# Altium PCB PCB.PcbDoc (part 1 of 2)
Units mil, origin at the board's own origin, x right, y up, seen from the top; angles counter-clockwise.
Board outline 2362.2 x 3307.09 mil, 4 copper layers (Top Layer, Gnd, Power, Bottom Layer), stack 23.756 mil thick; 68 components, 50 nets, 353 pads, 514 vias.
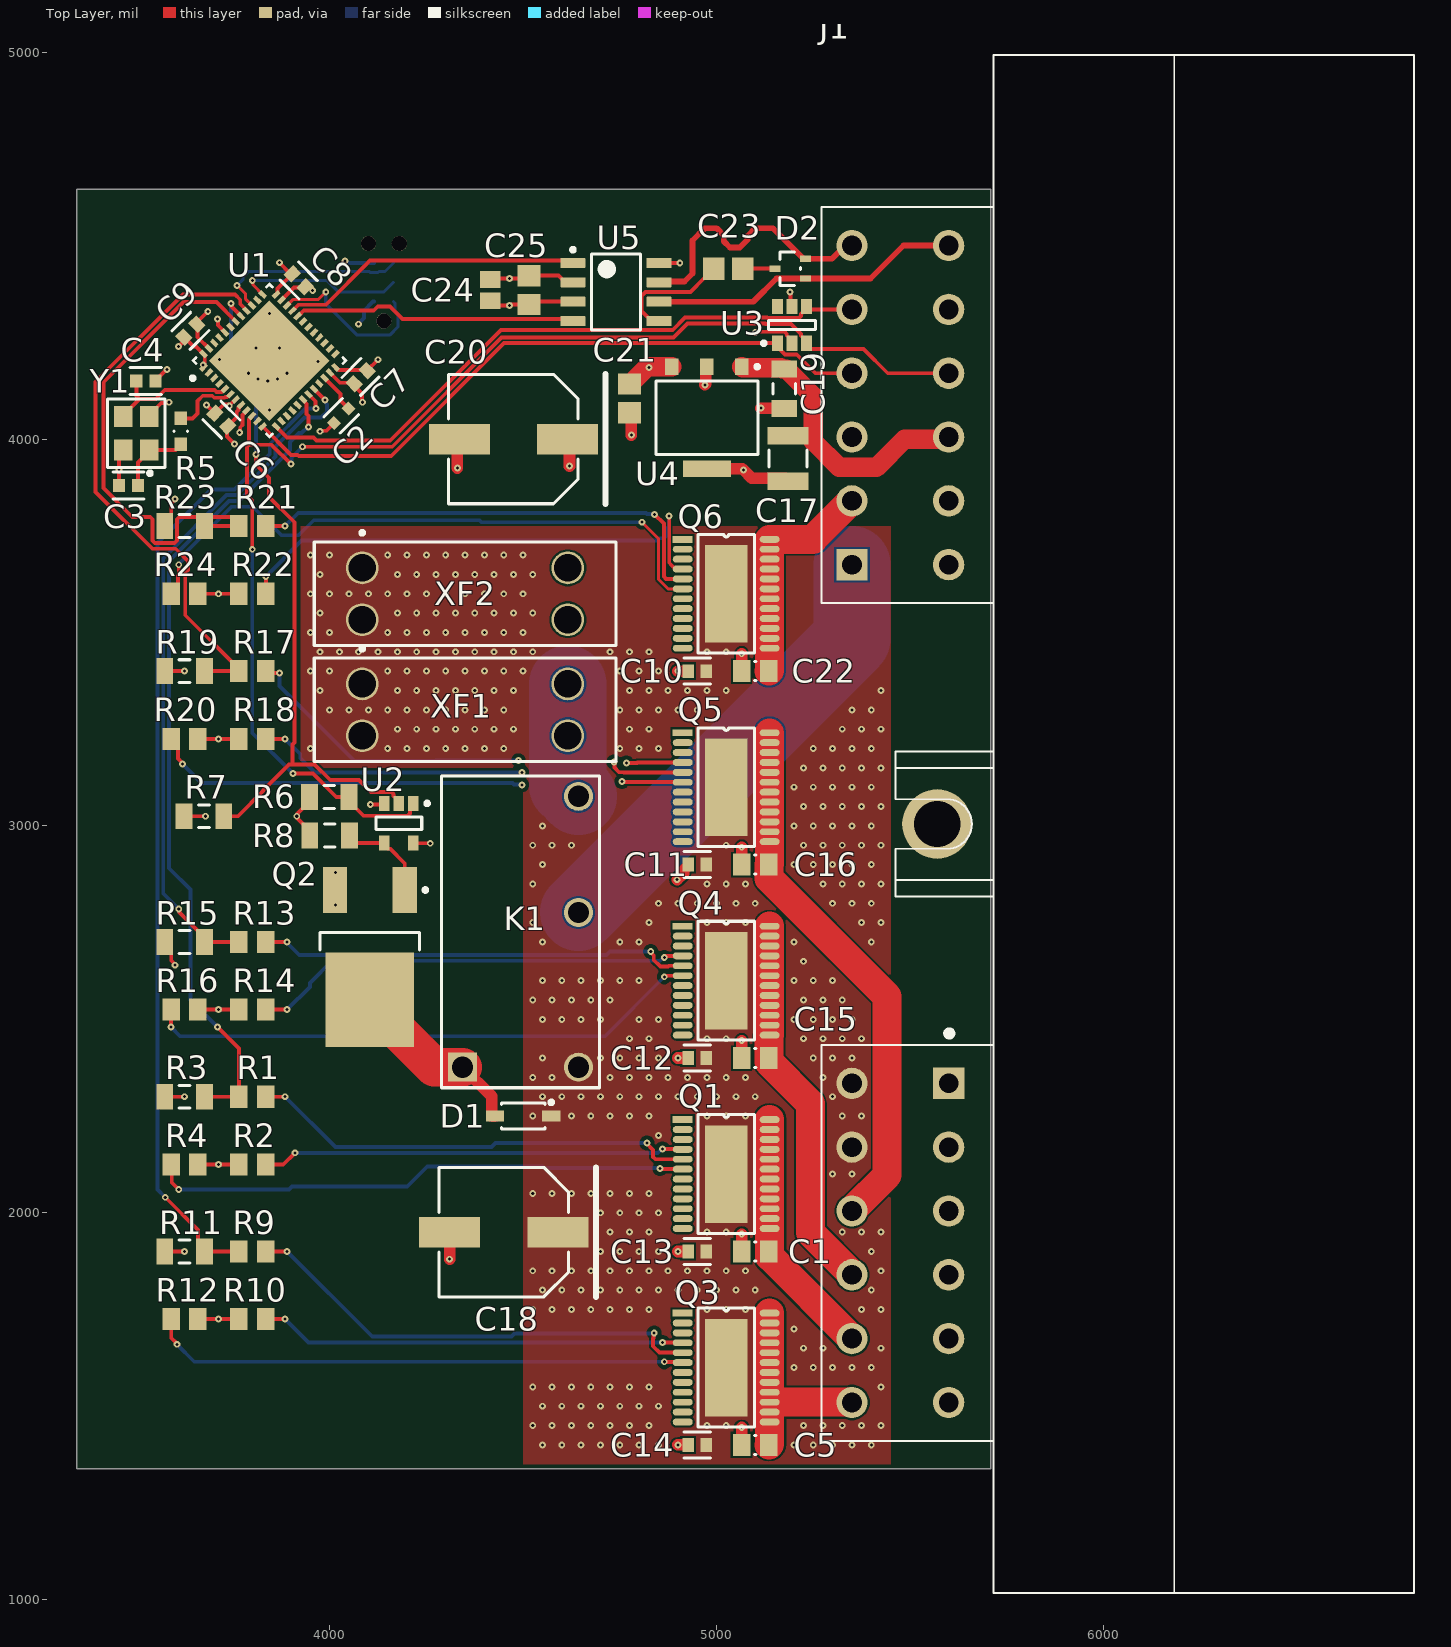
[diagram p0: Top Layer view]
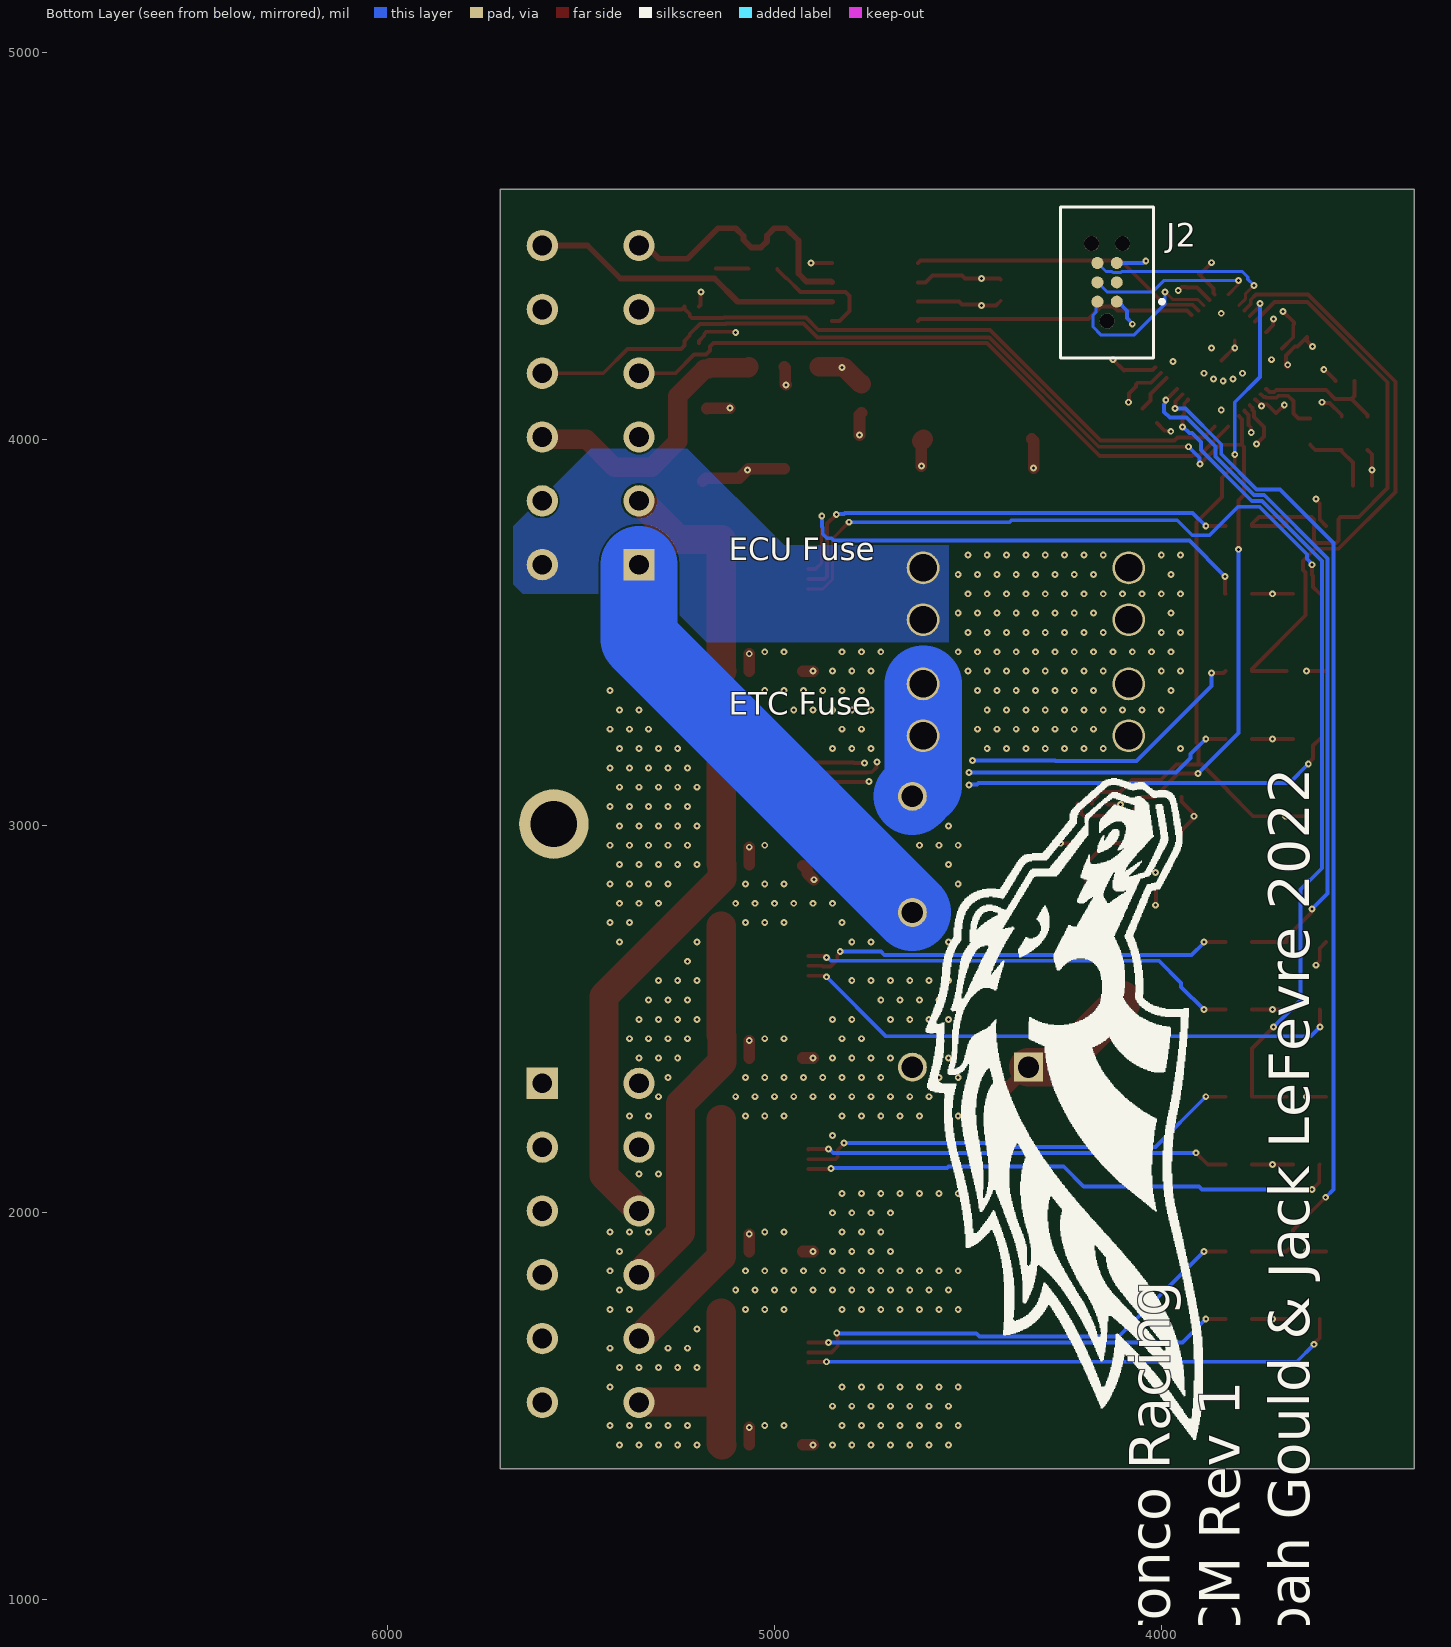
[diagram p1: Bottom Layer view, seen from below]
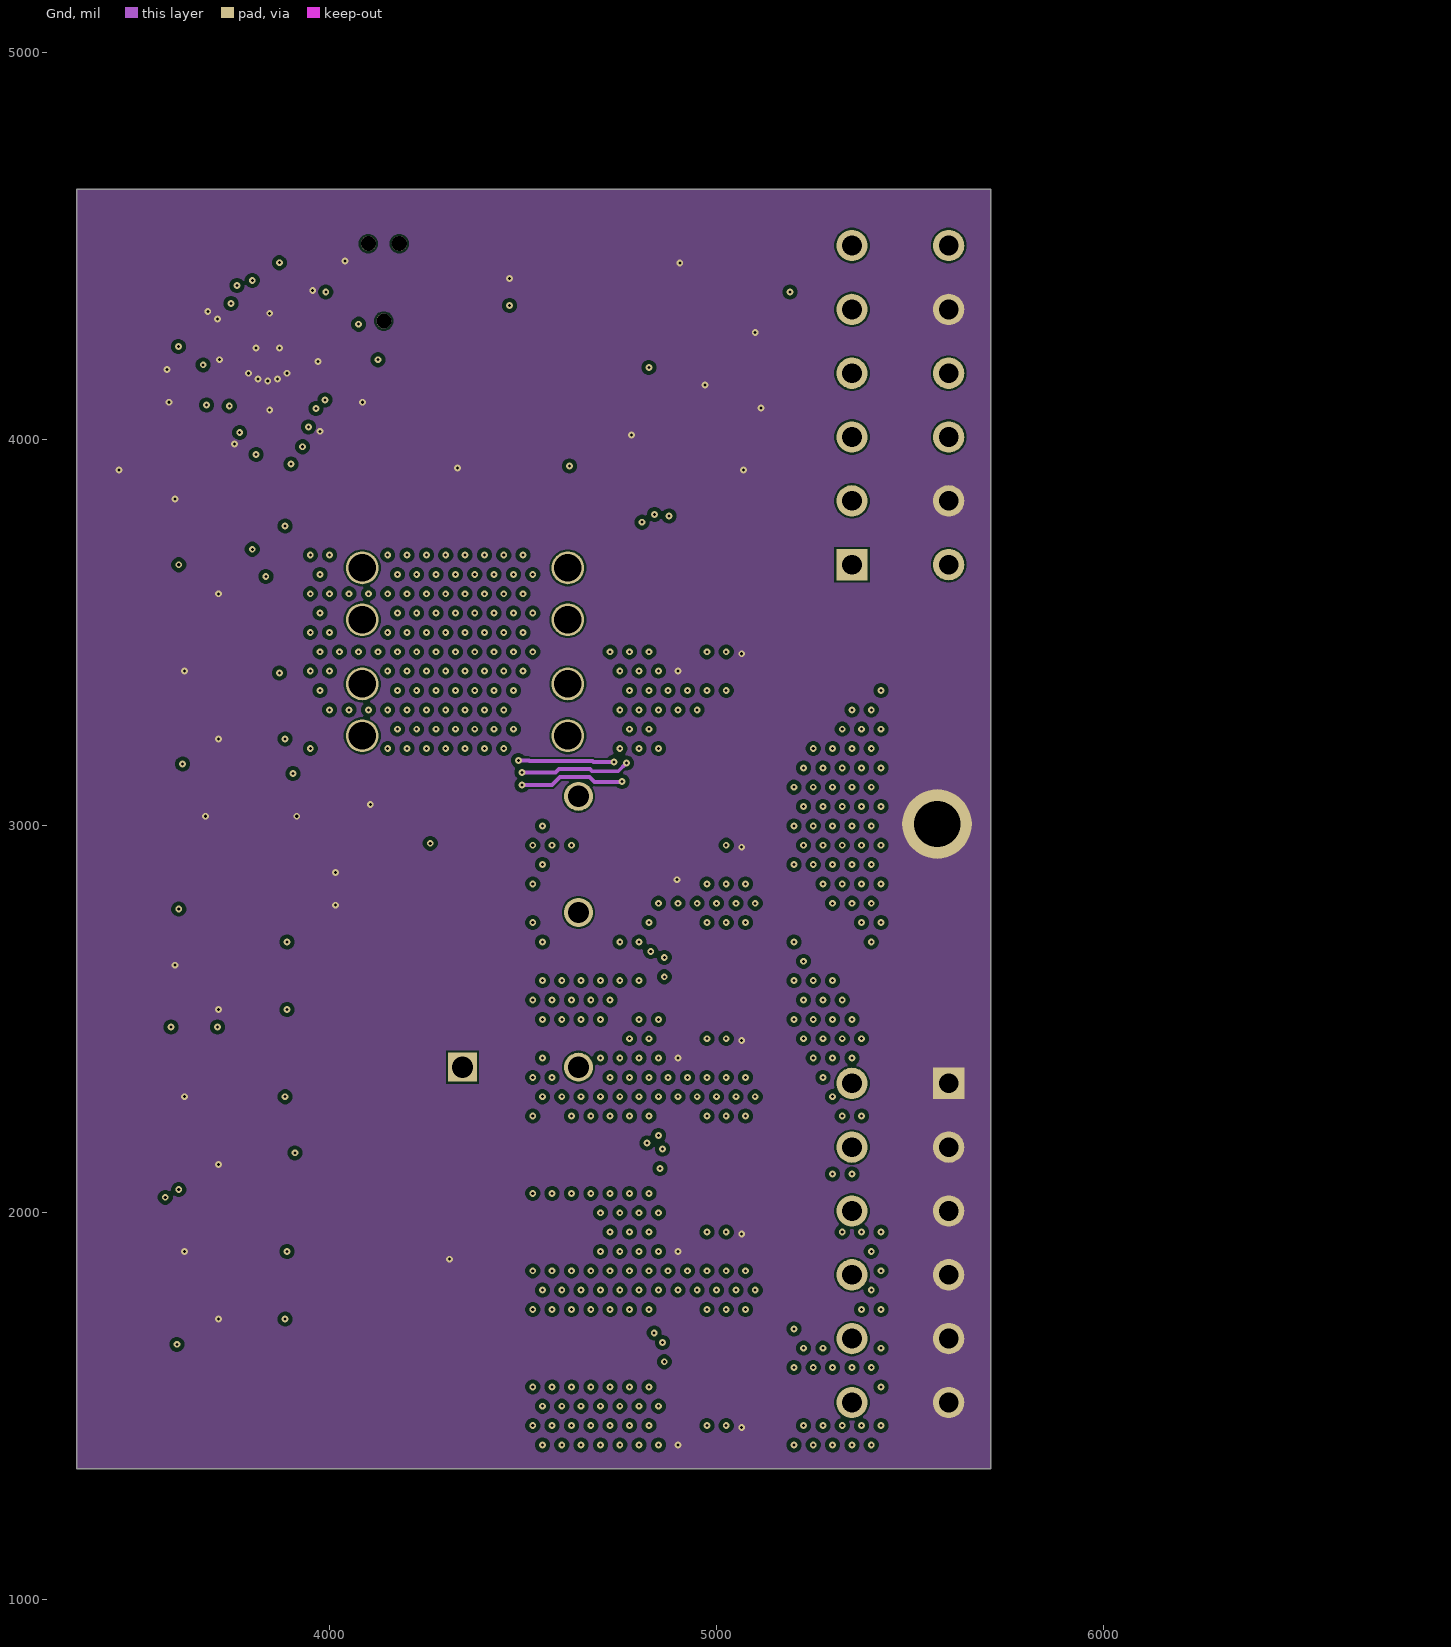
[diagram p2: Gnd]
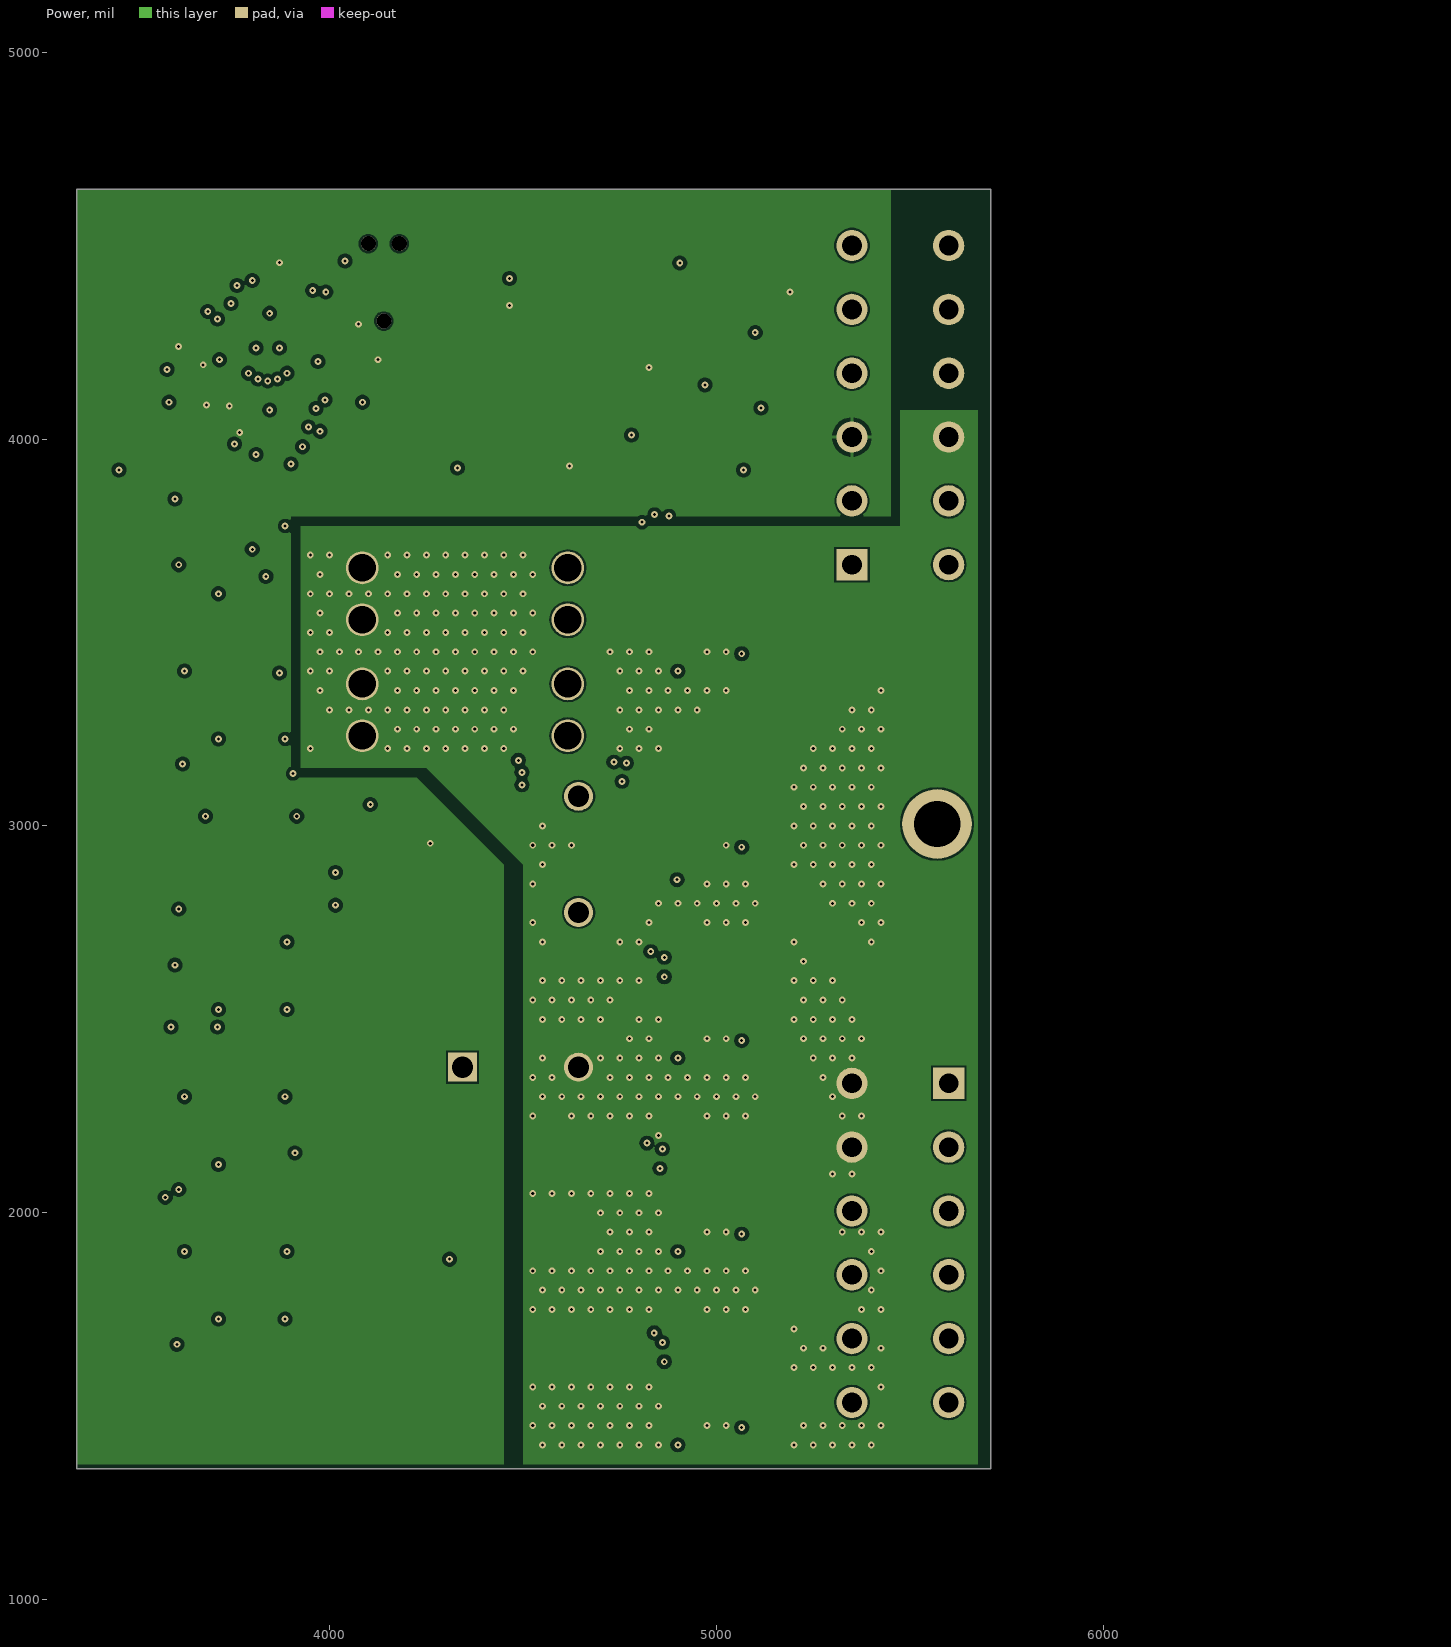
[diagram p3: Power]

## Layer stack, top to bottom
Top Solder: solder mask 0.4, Solder Resist, Dk 3.5
Top Layer: signal copper 1.4
Dielectric 2: prepreg 2.8, PP-006, Dk 4.1
Gnd: signal copper 1.378
Dielectric 1: dielectric 12.6, FR-4, Dk 4.8
Power: signal copper 1.378
Dielectric 3: prepreg 2.8, PP-006, Dk 4.1
Bottom Layer: signal copper 1.4
Bottom Solder: solder mask 0.4, Solder Resist, Dk 3.5

## Board outline
3346.46,4645.67 5708.66,4645.67 5708.66,1338.58 3346.46,1338.58

## Design rules (kind name [scope] priority, off if disabled: settings)
Clearance "Stitching +12" [IsStitchingVia and InNet('+12') vs (IsVia and (Not IsStitchingVia)) Or IsPad] p1: gap=10 ignorepadtopadclearanceinfootprint=FALSE
Clearance [All] p2: gap=5 ignorepadtopadclearanceinfootprint=TRUE except(7.87: Arc-THPad Track-THPad SMDPad-THPad; 10: Arc-Via Track-Via SMDPad-Via THPad-Via Via-Via Via-Fill Via-Poly Via-Region; 12.99: Arc-Hole Track-Hole; 19.68: THPad-THPad Via-Hole)
ComponentClearance [All] p1: gap=4 collisioncheckmode=3 verticalgap=4 showdistances=TRUE
DiffPairsRouting [All] p1: maxlimit=10 minlimit=10 mostfreqgap=10 toplayer_minwidth=15 toplayer_maxwidth=15 toplayer_prefwidth=15 midlayer1_minwidth=15 midlayer1_maxwidth=15 midlayer1_prefwidth=15 midlayer2_minwidth=15 midlayer2_maxwidth=15 midlayer2_prefwidth=15 bottomlayer_minwidth=15 bottomlayer_maxwidth=15 bottomlayer_prefwidth=15 maxuncoupledlength=500
PlaneConnect 12V [InNet('+12')] p1: planeconnectstyle=Direct reliefexpansion=20 reliefentries=4 reliefconductorwidth=10 reliefairgap=10
PlaneConnect GND [InNet('GND')] p2: planeconnectstyle=Direct reliefexpansion=20 reliefentries=4 reliefconductorwidth=10 reliefairgap=10
PlaneConnect ECUPowerOut [InNet('ECUPowerOut')] p3: planeconnectstyle=Direct reliefexpansion=20 reliefentries=4 reliefconductorwidth=10 reliefairgap=10
PlaneConnect [All] p4: planeconnectstyle=Relief reliefexpansion=20 reliefentries=4 reliefconductorwidth=10 reliefairgap=10
PolygonConnect +12 [InNet('+12')] p1: connectstyle=Direct reliefconductorwidth=10 reliefentries=4 polygonreliefangle="90 Angle" airgapwidth=10
PolygonConnect Poly_gnd [InNet('GND')] p2: connectstyle=Direct reliefconductorwidth=10 reliefentries=4 polygonreliefangle="90 Angle" airgapwidth=10
PolygonConnect Poly_ECUPowerOut [InNet('ECUPowerOut')] p3: connectstyle=Direct reliefconductorwidth=10 reliefentries=4 polygonreliefangle="90 Angle" airgapwidth=10
PolygonConnect [All] p4: thpad.connectstyle=Relief thpad.reliefconductorwidth=10 thpad.reliefentries=4 thpad.polygonreliefangle="90 Angle" thpad.airgapwidth=10 smdpad.connectstyle=Direct smdpad.reliefconductorwidth=10 smdpad.reliefentries=4 smdpad.polygonreliefangle="90 Angle" smdpad.airgapwidth=10 via.connectstyle=Direct via.reliefconductorwidth=10 via.reliefentries=4 via.polygonreliefangle="90 Angle" via.airgapwidth=10
RoutingVias [All] p1: holewidth=19.68 width=39.37 viastyle="Through Hole" minholewidth=7.87 minwidth=17.72 maxholewidth=39.37 maxwidth=78.74
SilkToSolderMaskClearance [IsPad] p1: minsilkscreentomaskgap=4 clearancetoexposedcopper=TRUE
SolderMaskExpansion [All] p1: expansion=4 istentingtop=FALSE
Width [All] p1: maxlimit=200 minlimit=8 preferedwidth=10
26 further rules are at their usual default settings.

## Classes and differential pairs
differential pair CAN: +CAN_P -CAN_N

## Components (designator, comment, footprint, x,y, rotation, side; value= is the part's Value field where it differs from the comment)
C1 "CAP 10nF 50V 0805(2012)" CAPC0805(2012)75_N 5100,1900 r0 top value=10nF
C2 "2.2uF" FP-GRM188-0_1-e0_2_0_5-MFG 4030,4060 r225 top
C3 "10p" FP-0603-L_1_6_0_15-W_0_81-IPC_C 3480,3880 r180 top
C4 "10p" FP-0603-L_1_6_0_15-W_0_81-IPC_C 3525,4150 r0 top
C5 "CAP 10nF 50V 0805(2012)" CAPC0805(2012)75_N 5100,1400 r0 top value=10nF
C6 "0.1u" FP-C0603C-CF-MFG 3720,4050 r315 top value="0.10 μF"
C7 "0.1u" FP-C0603C-CF-MFG 4080,4160 r225 top value="0.10 μF"
C8 "0.1u" FP-C0603C-CF-MFG 3920,4410 r315 top value="0.10 μF"
C9 "0.1u" FP-C0603C-CF-MFG 3640,4280 r45 top value="0.10 μF"
C10 "0.1u" FP-C0603C-CF-MFG 4950,3400 r180 top value="0.10 μF"
C11 "0.1u" FP-C0603C-CF-MFG 4950,2900 r180 top value="0.10 μF"
C12 "0.1u" FP-C0603C-CF-MFG 4950,2400 r180 top value="0.10 μF"
C13 "0.1u" FP-C0603C-CF-MFG 4950,1900 r180 top value="0.10 μF"
C14 "0.1u" FP-C0603C-CF-MFG 4950,1400 r180 top value="0.10 μF"
C15 "CAP 10nF 50V 0805(2012)" CAPC0805(2012)75_N 5100,2400 r0 top value=10nF
C16 "CAP 10nF 50V 0805(2012)" CAPC0805(2012)75_N 5100,2900 r0 top value=10nF
C17 "CAP 2.2uF 100V 1210(3225)" CAPC1210(3225)280_N 5185,3950 r270 top value=2.2uF
C18 "EEEFK1H101P" PNSC-FK-V-F_V 4450,1950 r180 top
C19 "12065C334KAT2A" CAPC3216X152X50LL20T25 5175,4130 r270 top
C20 "EEEFK1H101P" PNSC-FK-V-F_V 4475,4000 r180 top
C21 "GRM21BR71H104KA01L" CAPC2013X135X45ML10T25 4775,4105 r270 top
C22 "CAP 10nF 50V 0805(2012)" CAPC0805(2012)75_N 5100,3400 r0 top value=10nF
C23 "0.1uF" CAPC2013X135X45ML10T25 5030,4440 r0 top
C24 "C0805C105K3RACTU" CAPC2013X140X50LL20T25 4415,4385 r90 top
C25 "GRM21BR71H104KA01L" CAPC2013X135X45ML10T25 4515,4385 r90 top
D1 "BAT46W-7-F" DIOD-SOD-123-2_V 4500,2250 r0 top
D2 "ESDCAN02-2BWY" FP-SOT323-3L-MFG 5190.63,4440.59 r180 top value=3pF
J1 "DTM1312PA12PBR008" TE_DTM1312PA12PBR008 5522.83,3004.92 r90 top
J2 "TC2030-CTX-NL" Tag_Connect_0_MFG 4140,4405 r90 bottom
K1 "ALQ312" PNSC-LQ-4-2000x1000x1600_V 4343.35,2376.38 r90 top
Q1 "BTS700121ESPXUMA1" "24-TSSOP (0.154\", 3.90mm Width) Exposed Pad" 4912.6,2240.75 r0 top
Q2 "NTD24N06LT4G" ONSC-DPAK-3-369C-01_V 4103.94,2661.02 r270 top
Q3 "BTS700121ESPXUMA1" "24-TSSOP (0.154\", 3.90mm Width) Exposed Pad" 4912.6,1740.75 r0 top
Q4 "BTS700121ESPXUMA1" "24-TSSOP (0.154\", 3.90mm Width) Exposed Pad" 4912.6,2740.75 r0 top
Q5 "BTS700121ESPXUMA1" "24-TSSOP (0.154\", 3.90mm Width) Exposed Pad" 4912.6,3240.75 r0 top
Q6 "BTS700121ESPXUMA1" "24-TSSOP (0.154\", 3.90mm Width) Exposed Pad" 4912.6,3740.75 r0 top
R1 "4.7k" RESC2013X70X40NL20T20 3800,2300 r0 top
R2 "47R" RESC2013X70X40NL20T20 3800,2125 r0 top
R3 "10k" RESC3216X70X50LL20T25 3625,2300 r180 top
R4 "4.7k" RESC2013X70X40NL20T20 3625,2125 r180 top
R5 "0R" FP-RC0603-MFG 3615,4020 r270 top value=0Ω
R6 "ERA8AEB103V" RESC3216X70X50LL20T25 3998.82,3075 r180 top
R7 "ERA8AEB103V" RESC3216X70X50LL20T25 3675,3025 r180 top
R8 "ERA8AEB103V" RESC3216X70X50LL20T25 4000,2975 r180 top
R9 "4.7k" RESC2013X70X40NL20T20 3800,1900 r0 top
R10 "47R" RESC2013X70X40NL20T20 3800,1725 r0 top
R11 "10k" RESC3216X70X50LL20T25 3625,1900 r180 top
R12 "4.7k" RESC2013X70X40NL20T20 3625,1725 r180 top
R13 "4.7k" RESC2013X70X40NL20T20 3800,2700 r0 top
R14 "47R" RESC2013X70X40NL20T20 3800,2525 r0 top
R15 "10k" RESC3216X70X50LL20T25 3625,2700 r180 top
R16 "4.7k" RESC2013X70X40NL20T20 3625,2525 r180 top
R17 "4.7k" RESC2013X70X40NL20T20 3800,3400 r0 top
R18 "47R" RESC2013X70X40NL20T20 3800,3225 r0 top
R19 "10k" RESC3216X70X50LL20T25 3625,3400 r180 top
R20 "4.7k" RESC2013X70X40NL20T20 3625,3225 r180 top
R21 "4.7k" RESC2013X70X40NL20T20 3800,3775 r0 top
R22 "47R" RESC2013X70X40NL20T20 3800,3600 r0 top
R23 "10k" RESC3216X70X50LL20T25 3625,3775 r180 top
R24 "4.7k" RESC2013X70X40NL20T20 3625,3600 r180 top
U1 "STM32F412CGU6" FP-UFQFPN48-A0B9-MFG 3844.33,4202.76 r45 top
U2 "NC7SZ08M5X" FAIR-SOT23-5_V 4178.94,3006.97 r270 top
U3 "CM1293A-04SO" ONSC-SC-74-6-318F-05_V 5195,4295 r90 top
U4 "LT1129IST-3.3#PBF" LT-ST-3-SOT-223_L 4975,4055 r270 top
U5 "SN65HVD230D" D0008A_M 4740,4380 r0 top
XF1 "3557-2" KSTN-3557-2 4350,3300 r0 top
XF2 "3557-2" KSTN-3557-2 4350,3600 r0 top
Y1 "24MHz" FP-7M-MFG 3500,4015 r90 top

## Footprints (in the part's own frame and the unit in brackets; to place one, negate y for a bottom-side part, rotate by r counter-clockwise, add the part's x,y. Pads: shape width x height; smd on the part's side, far side on the other; paste and mask are expansions set on the pad)
"24-TSSOP (0.154\", 3.90mm Width) Exposed Pad" [mm]
  rect 1.31x0.45 smd: 1(0,0)
  oval 1.31x0.45 smd: 2(0,-0.65) 3(0,-1.3) 4(0,-1.95) 5(0,-2.6) 6(0,-3.25) 7(0,-3.9) 8(0,-4.55) 9(0,-5.2) 10(0,-5.85) 11(0,-6.5) 12(0,-7.15) 13(5.71,-7.15) 14(5.71,-6.5) 15(5.71,-5.85) 16(5.71,-5.2) 17(5.71,-4.55) 18(5.71,-3.9) 19(5.71,-3.25) 20(5.71,-2.6) 21(5.71,-1.95) 22(5.71,-1.3) 23(5.71,-0.65) 24(5.71,0)
  rect 2.77x6.4 smd paste-2539.97: 25(2.855,-3.575)
  silkscreen extent 1.02,-7.48 4.7,0.33
CAPC0805(2012)75_N [mm] "Chip Capacitor, Body 2.0x1.2mm, Height 0.75mm, IPC Medium Density"
  rect 1.15x1.45 smd: 1(-0.9,0) 2(0.9,0)
  silkscreen extent -0.05,-0.62 0.05,0.63, body extent -1.1,-0.72 1.1,0.73, height 0.75
CAPC1210(3225)280_N [mm] "Chip Capacitor, Body 3.2x2.5mm, Height 2.8mm, IPC Medium Density"
  rect 1.15x2.7 smd: 1(-1.5,0) 2(1.5,0)
  silkscreen extent -0.55,-1.25 0.55,1.25, body extent -1.7,-1.4 1.7,1.4, height 2.8
CAPC2013X135X45ML10T25 [mm] "Chip Capacitor, 2-Leads, Body 2.10x1.35mm, IPC Low Density"
  rect 1.4x1.5 smd: 1(-0.95,0) 2(0.95,0)
  body extent -1.05,-0.67 1.05,0.67, height 1.35
CAPC2013X140X50LL20T25 [mm] "Chip Capacitor, 2-Leads, Body 2.00x1.25mm, IPC High Density"
  rect 1.1x1.35 smd: 1(-0.7,0) 2(0.7,0)
  body extent -1.1,-0.72 1.1,0.72, height 1.4
CAPC3216X152X50LL20T25 [mm] "Chip Capacitor, 2-Leads, Body 3.20x1.60mm, IPC High Density"
  rect 1.1x1.7 smd: 1(-1.3,0) 2(1.3,0)
  silkscreen extent -0.35,-0.75 0.35,0.75, body extent -1.7,-0.9 1.7,0.9, height 1.52
D0008A_M [mm] "SOIC, 8-Leads, Body 5x4mm, Pitch 1.27mm, IPC Low Density"
  rrect15% 1.65x0.65 smd: 1(-2.825,1.905) 2(-2.825,0.635) 3(-2.825,-0.635) 4(-2.825,-1.905) 5(2.825,-1.905) 6(2.825,-0.635) 7(2.825,0.635) 8(2.825,1.905)
  silkscreen extent -2.95,-2.5 1.6,2.9, body extent -3,-2.45 3,2.45, height 1.63
DIOD-SOD-123-2_V [mm] "SOD-123, 2-Leads, Body 2.85x1.7mm (max), Pitch 3.7mm"
  rect 1.2x0.7 smd: 1(-1.85,0) 2(1.85,0)
  silkscreen extent -1.43,-0.85 1.97,1.02, body extent -1.42,-0.85 1.43,0.85, height 1.45
FAIR-SOT23-5_V [mm] "SOT23, 5-Leads, Body 3x1.7mm, Pitch 0.95mm"
  rect 1x0.7 smd: 1(-1.3,0.95) 2(-1.3,0) 3(-1.3,-0.95) 4(1.3,-0.95) 5(1.3,0.95)
  silkscreen extent -1.42,-1.5 0.4,1.98, body extent -1.5,-1.5 1.5,1.5, height 1.45
FP-7M-MFG [mm]
  rect 1.4x1.2 smd paste+0 mask+0: 1(-1.1,-0.85) 2(1.1,-0.85) 3(1.1,0.85) 4(-1.1,0.85)
  silkscreen extent -2.75,-1.9 2.25,1.9, body extent -1.9,-1.55 1.9,1.55, height 0.25
FP-0603-L_1_6_0_15-W_0_81-IPC_C [mil]
  rect 31.75x34.18 smd paste+0 mask+0: 1(-24.64,0) 2(24.64,0)
  silkscreen extent -41,-35 41,35, body extent -44,-23 44,23, height 10
FP-C0603C-CF-MFG [mm]
  rect 0.75x0.9 smd paste+0 mask+0: 1(-0.6,0) 2(0.6,0)
  silkscreen extent -0.87,-0.85 0.88,0.85, body extent -1.2,-0.6 1.2,0.6, height 0.25
FP-GRM188-0_1-e0_2_0_5-MFG [mm]
  rect 0.65x0.7 smd paste+0 mask+0: 1(-0.675,0) 2(0.675,0)
  silkscreen extent -0.85,-0.75 0.85,0.75, body extent -1.1,-0.55 1.1,0.55, height 0.25
FP-RC0603-MFG [mm]
  rect 0.9x0.8 smd paste+0 mask+0: 1(-0.85,0) 2(0.85,0)
  silkscreen extent -0.03,-0.45 0.03,0.45, body extent -1.4,-0.55 1.4,0.55, height 0.25
FP-SOT323-3L-MFG [mm]
  rect 0.7x0.42 smd paste+0 mask+0: 1(-1,0.65) 2(-1,-0.65) 3(1,0)
  silkscreen extent -0.67,-1.1 0.67,1.1, body extent -1.45,-1.2 1.45,1.2, height 0.25
FP-UFQFPN48-A0B9-MFG [mm]
  rect 0.55x0.3 smd paste+0 mask+0: 1(-3.375,2.75) 2(-3.375,2.25) 3(-3.375,1.75) 4(-3.375,1.25) 5(-3.375,0.75) 6(-3.375,0.25) 7(-3.375,-0.25) 8(-3.375,-0.75) 9(-3.375,-1.25) 10(-3.375,-1.75) 11(-3.375,-2.25) 12(-3.375,-2.75) 25(3.375,-2.75) 26(3.375,-2.25) 27(3.375,-1.75) 28(3.375,-1.25) 29(3.375,-0.75) 30(3.375,-0.25) 31(3.375,0.25) 32(3.375,0.75) 33(3.375,1.25) 34(3.375,1.75) 35(3.375,2.25) 36(3.375,2.75)
  rect 0.3x0.55 smd paste+0 mask+0: 13(-2.75,-3.375) 14(-2.25,-3.375) 15(-1.75,-3.375) 16(-1.25,-3.375) 17(-0.75,-3.375) 18(-0.25,-3.375) 19(0.25,-3.375) 20(0.75,-3.375) 21(1.25,-3.375) 22(1.75,-3.375) 23(2.25,-3.375) 24(2.75,-3.375) 37(2.75,3.375) 38(2.25,3.375) 39(1.75,3.375) 40(1.25,3.375) 41(0.75,3.375) 42(0.25,3.375) 43(-0.25,3.375) 44(-0.75,3.375) 45(-1.25,3.375) 46(-1.75,3.375) 47(-2.25,3.375) 48(-2.75,3.375)
  rect 5.6x5.6 smd paste+0 mask+0: 49(0,0)
  silkscreen extent -4.5,-3.55 3.55,3.55, body extent -3.75,-3.75 3.75,3.75, height 0.25
KSTN-3557-2 [mm] "Fuse Holder, PCB Mount, Thru-Hole, Body 19.8x6.8mm, Height 7.4mm"
  round 2.15 hole 1.8: 1(-6.75,1.7) 2(-6.75,-1.7) 3(6.75,1.7) 4(6.75,-1.7)
  silkscreen extent -9.9,-3.4 9.9,4.12, body extent -9.91,-3.37 9.91,3.37, height 7.74
LT-ST-3-SOT-223_L [mm] "SOT223, 4-Leads, Body 6.505x3.505mm, Pitch 2.3mm, IPC High Density"
  rect 1.1x0.9 smd: 1(-3.35,2.3) 2(-3.35,0) 3(-3.35,-2.3)
  rect 1.1x3.15 smd: 4(3.35,0)
  silkscreen extent -3.47,-3.35 2.4,3.43, body extent -1.86,-3.35 1.86,3.35, height 1.8
ONSC-DPAK-3-369C-01_V [mm] "DPAK, 3-Leads, Body 6.54x6.095mm, Pitch 2.29mm"
  rect 3x1.6 smd: 1(-4.4,2.29) 3(-4.4,-2.29)
  rect 6.2x5.8 smd: 4(2.8,0)
  silkscreen extent -4.52,-3.27 -0.45,3.77, body extent -1.6,-3.27 4.49,3.27, height 2.38
ONSC-SC-74-6-318F-05_V [mm] "SOT23, 6-Leads, Body 3x1.5mm, Pitch 0.95mm"
  rect 1x0.7 smd: 1(-1.2,0.95) 2(-1.2,0) 3(-1.2,-0.95) 4(1.2,-0.95) 5(1.2,0) 6(1.2,0.95)
  silkscreen extent -1.32,-1.55 0.3,1.97, body extent -0.75,-1.5 0.75,1.5, height 1.1
PNSC-FK-V-F_V [mm] "CAPAE, 2-Leads, Body 8.50x8.50mm"
  rect 4x2 smd: 1(-3.55,0) 2(3.55,0)
  silkscreen extent -6.05,-4.25 4.25,4.25, body extent -5,-4.25 5,4.25, height 10.5
PNSC-LQ-4-2000x1000x1600_V [mm] "LQ, 4-Leads, Body 20x10mm"
  rect 1.9x1.9 hole 1.4: 1(0,0)
  round 1.9 hole 1.4: 2(17.78,-7.62) 3(10.16,-7.62) 4(0,-7.62)
  silkscreen extent -1.35,-9.01 19.13,1.39, body extent -1.31,-9.01 19.09,1.39, height 16.6
RESC2013X70X40NL20T20 [mm] "Chip Resistor, 2-Leads, Body 2.2x1.35mm, IPC Medium Density"
  rect 1.15x1.45 smd: 1(-0.875,0) 2(0.875,0)
  body extent -1.1,-0.72 1.1,0.72, height 0.7
RESC3216X70X50LL20T25 [mm] "Chip Resistor, 2-Leads, Body 3.20x1.60mm, IPC High Density"
  rect 1.1x1.7 smd: 1(-1.3,0) 2(1.3,0)
  silkscreen extent -0.35,-0.75 0.35,0.75, body extent -1.7,-0.9 1.7,0.9, height 0.7
Tag_Connect_0_MFG [mil]
  round 30.98 smd paste-39370.1 mask+0: 1(-50,-25) 2(-50,25) 3(0,-25) 4(0,25) 5(50,-25) 6(50,25)
  round 39.02 hole 39.02 unplated paste-39370.1 mask+0: ""(-100,0) ""(100,-40) ""(100,40)
  silkscreen extent -195,-147 195,120, body extent -375,-210 195,210, height 5947
TE_DTM1312PA12PBR008 [mm]
  rect 2.056x2.056 hole 1.294: A1(-17.025,-1.96) B1(17.025,4.39)
  round 2.056 hole 1.294: A2(-21.215,-1.96) A3(-25.405,-1.96) A4(-29.595,-1.96) A5(-33.785,-1.96) A6(-37.975,-1.96) A7(-37.975,4.39) A8(-33.785,4.39) A9(-29.595,4.39) A10(-25.405,4.39) A11(-21.215,4.39) A12(-17.025,4.39) B2(21.215,4.39) B3(25.405,4.39) B4(29.595,4.39) B5(33.785,4.39) B6(37.975,4.39) B7(37.975,-1.96) B8(33.785,-1.96) B9(29.595,-1.96) B10(25.405,-1.96) B11(21.215,-1.96) B12(17.025,-1.96)
  silkscreen extent -50.5,-32.52 50.5,6.39

## Part data
C1 C5 C15 C16 C22: library part CMP-1036-03839-1, "CAP 10nF 50V ±5% 0805 (2012 Metric) Thickness 0.75mm SMD", Case-EIA=0805, Case-Metric=2012, Rated Voltage="50 V", Tolerance=Â±5%, Max Thickness="0.75 mm", Technology=SMT
C2: library part CMP-2006-02836-2, "Chip Multilayer Ceramic Capacitors for General Purpose, 0603, 2.2uF, X7R, 15%, 10%, 10V", Case Code (Imperial)=0603, Case Code (Metric)=1608, Dielectric=X7R, Max Operating Temperature=125°C, Min Operating Temperature=-55°C, Package Quantity=1, Tolerance=10%, Voltage=10V, Capacitance=2.2uF, Case/Package=0603, Depth=0.8mm, Height=0.8mm, Lead Free="Lead Free", Length=1.6mm, Material=Ceramic, Mount="Surface Mount", Number of Pins=2, Packaging="Cut Tape", REACH SVHC="No SVHC", Termination=SMD/SMT, Thickness=0.035inch, Voltage Rating=10V, Voltage Rating (DC)=10V, Weight=7.1E-05oz, Width=0.031inch
C3 C4: library part CMP-2006-04216-2, "General Purpose Ceramic Capacitor, 0603, 10pF, 10%, NP0, 30ppm/°C, 50V", Capacitance=10pF, Case Code (Imperial)=0603, Case Code (Metric)=1608, Dielectric=C0G, Max Operating Temperature=125°C, Min Operating Temperature=-55°C, Package Quantity=1, Tolerance=10%, Voltage=50V, Case/Package=0603, Construction=Flat, Contact Plating=Tin, Depth=0.81mm, Lead Free="Lead Free", Length=1.6mm, Mount="Surface Mount", Number of Pins=2, Packaging="Tape and Reel", Radiation Hardening=No, REACH SVHC="No SVHC", RoHS Compliant=Yes, Series=-, Termination=SMD/SMT, Thickness=0.035inch, Voltage Rating=50V, Voltage Rating (DC)=50V, Width=0.032inch
C6 C7 C8 C9 C10 C11 C12 C13 C14: library part CMP-2006-03061-2, "CAP CER 0.1UF 50V X7R 0603", Capacitance="0.10 μF", Manufacturer=KEMET, Manufacturer Part Number=C0603C104K5RACTU, Package=C0603C-CF, Temperature="-55°C to +125°C", Temperature Characteristic=X7R, Temperature Coefficient=30ppm/°C, Temperature Range High=+125°C, Temperature Range Low=-55°C, Tolerance=0.1, Voltage Rating="50 V", Automotive=Yes, Automotive Grade="Grade 1", Category=Cap, ComponentLink2Description=Datasheet, ComponentLink2URL=https://api.kemet.com/component-edge/download/datasheet/C0603C100J5GACAUTO.pdf, Device Class L1="Passive Components", Device Class L2=Capacitors, Device Class L3="Ceramic Capacitors", Digikey Description="CAP CER 0.1UF 50V X7R 0603", Height=0.87mm, Lead Free=Yes, Material=Ceramic, Octopart=https://octopart.com/c0603c104k5ractu-kemet-139244, RoHS=TRUE
C17: library part CMP-1038-02104-1, "CAP 2.2uF 100V ±10% 1210 (3225 Metric) Thickness 2.8mm SMD", Case-EIA=1210, Case-Metric=3225, Rated Voltage="100 V", Tolerance=Â±10%, Max Thickness="2.8 mm", Technology=SMT
C18 C20: library part CMP-2000-06208-1, "Aluminum Electrolytic Capacitor, 100 uF, +/- 20%, 50 V, 2-Pin SMD (Size Code F), -55 to 105 degC, RoHS, Tape and Reel", Capacitance=100µF, Case Size/Dimension=Ø8x10.2mm, Lifetime@Temperature=2000Hrs@105°C, Manufacturer=Panasonic, Operating Temp Range=-55to+105°C, Operating Temp-Max=105°C, Package Description="2-Pin Electrolytic Aluminum Capacitor, Body 8.3 x 8.3 mm", Package Reference=FK-V-F, Rated Voltage=50V, Ripple Current=350mA, Datasheet URL=http://industrial.panasonic.com/cdbs/www-data/pdf/RDE0000/ABA0000C1181.pdf, Datasheet Version=03/2016, Impedance=0.34O, Manufacturer URL=http://www.panasonic.com/, Mounting Technology=SurfaceMount, Package URL=http://industrial.panasonic.com/cdbs/www-data/pdf/RDE0000/DME0000COL48.pdf, Series=FK, Type=Can
C19: library part CMP-2000-05868-1, "Chip Capacitor, 330 nF, +/- 10%, 50 V, -55 to 125 degC, 1206 (3216 Metric), RoHS, Tape and Reel", Capacitance=330nF, Case Size/Dimension=1206, Dielectric=X7R, Manufacturer=AVX, Package Description="2-Pin Surface Mount Device, Body 3.2 x 1.6 mm", Rated Voltage=50V, Tolerance (%)=±10%, Datasheet URL=http://datasheets.avx.com/X7RDielectric.pdf, Datasheet Version=07/2016, Manufacturer URL=http://www.avx.com/, Mounting Technology=SurfaceMount, Package Reference=1206
C21 C23 C25: library part CMP-2100-03644-1, "Chip Capacitor, 0.1 uF, +/- 10%, 50 V, -55 to 125 degC, 0805 (2012 Metric), RoHS, Tape and Reel", Capacitance=100nF, Case Code (Imperial)=0805, Case Code (Metric)=2012, Dielectric=X7R, Dielectric Material=Ceramic, Insulation Resistance=10GR, Manufacturer=Murata, Max Operating Temperature=125degC, Min Operating Temperature=-55degC, Package Description="2-Pin Surface Mount Device, Body 2 x 1.25 mm", Package Quantity=1, Tolerance=10%, Voltage=50V, Case/Package=0805, Datasheet URL=http://psearch.en.murata.com/capacitor/product/GRM21BR71H104KA01%23.pdf, Datasheet Version=42675.0, Depth=1.25mm, Height=1.25mm, Lead Free=LeadFree, Length=2mm, Manufacturer URL=http://www.murata.com/, Material=Ceramic, Mount=SurfaceMount, Number of Pins=2, Package Reference=0805, Packaging=TapeandReel, Radiation Hardening=No, REACH SVHC=Unknown, RoHSCompliant=true, Termination=SMD/SMT, Thickness=0.053inch, Voltage Rating=50V, Voltage Rating (DC)=50V, Width=0.049inch
C24: library part CMP-2007-03234-1, Manufacturer=Kemet, Part Number=C0805C105K3RACTU
D1: library part CMP-0303-00004-1, "Surface Mount Schottky Barrier Diode, 100 V, -55 to 125 degC, 2-Pin SOD123, RoHS, Tape and Reel", Manufacturer="Diodes Inc", Operating Temperature="-55 to 125 degC", ComponentLink1Description="Manufacturer URL", ComponentLink1URL=http://www.diodes.com/, ComponentLink2Description=Datasheet, ComponentLink2URL=http://diodes.com/datasheets/ds30044.pdf, ComponentLink3Description="Package Specification", ComponentLink3URL=http://diodes.com/datasheets/ds30044.pdf, CT@1 V="12 pF Typ.", DatasheetVersion="Rev. 16-2", IR@1.5 V="0.3 uA Max.", Mounting Technology="Surface Mount", PackageDescription="2-Pin SMD, Body 2.7 x 1.55 mm, Height 1.45 mm", Packing="Tape and Reel", PartNumber=BAT46W-7-F, RoHS=TRUE, V(BR)R="100 V Min.", VF@10 mA="0.45 V Max."
D2: library part CMP-12225-000055-1, "TVS DIODE 26.5V 44V SOT323-3", Breakdown Voltage=28.5V, Capacitance=3pF, Clamping Voltage=44V, Manufacturer=STMicroelectronics, Max Junction Temp=+175°C, Package=SOT323-3L, Peak Pulse Current=3A, Peak Pulse Power=170W, Reverse Standoff Voltage=26.5V, Temperature="-55°C to +175°C", Temperature Range Low=-55°C, Automotive=Yes, Automotive Grade="Grade 0", Category=Diode, ComponentLink2Description=Datasheet, ComponentLink2URL=https://www.st.com/resource/en/datasheet/esdcan02-2bwy.pdf, Device Class L1="Circuit Protection", Device Class L2="TVS Diodes", Device Class L3=unset, Digikey Description="TVS DIODE 26.5V 44V SOT323-3", Direction=Bidirectional, Height=1.1mm, Ipc Land Pattern Name=SOT65P210X95-3, Lead Free=Yes, Manufacturer Part Number=ESDCAN02-2BWY, Mouser Description="TVS Diodes / ESD Suppressors Automotive dual-line Transil, Transient voltage suppressor (TVS) for CAN bus", Number Of Channels=2, Octopart=https://octopart.com/esdcan02-2bwy-stmicroelectronics-58631133, RoHS=TRUE, Standoff Height=0mm, Temperature Range High=+175°C
J1: "Double Header 24 pin receptacle", Package=None, Availability=Unavailable, MF="TE Connectivity", MP=DTM13-12PA-12PB-R008, Price=None, SnapEDA_Link=https://www.snapeda.com/parts/DTM13-12PA-12PB-R008/TE%20Connectivity%20Deutsch%20Connectors/view-part/?ref=snap, TE_purchase_URL=https://www.te.com/usa-en/product-DTM1312PA12PBR008.html?te_bu=Cor&te_type=disp&te_campaign=seda_glo_cor-seda-global-disp-prtnr-fy19-seda-model-bom-cta_sma-317_1&elqCampaignId=32493
K1: library part CMP-1503-00190-1, "LQ Relays, 12 V Coil Voltage, 200 mW Nominal Operating Power, -40 to 85 degC, 4-Pin LQ, Carton, Case, RoHS", Coil Voltage="12 V", Manufacturer=Panasonic, Max Switching Current="10 A (N.O.), 3 A (N.C.)", Max Switching Voltage="250 V AC", Nominal Operating Power="200 mW", ComponentLink1Description="Manufacturer URL", ComponentLink1URL=http://www3.panasonic.biz/ac/ae/index.jsp, ComponentLink2Description=Datasheet, ComponentLink2URL=http://www3.panasonic.biz/ac/e_download/control/relay/power/catalog/mech_eng_lq.pdf?f_cd=401220, ComponentLink3Description="Package Specification", ComponentLink3URL=http://www3.panasonic.biz/ac/e_download/control/relay/power/catalog/mech_eng_lq.pdf?f_cd=401220, DatasheetVersion=201410-T, Electrical Life=5x10^4, Mechanical Life(Min.operation)=1x10^7, Mounting Technology="Through Hole", PackageDescription="4-Pin Through Hole Terminal Package, Body 20 x 10 mm", PackageReference=LQ-4-2000x1000x1600, PackageVersion="ASCTB92E, 10/2014", Packing="Carton, Case", PartNumber=ALQ312, Pb-Free=True, RoHS=True, Series="LQ Relays"
Q1 Q3 Q4 Q5 Q6: "Integrated Circuit", Manufacturer_Name=Infineon, Mouser Part Number=726-BTS700121ESPXUMA, Datasheet Link=https://www.infineon.com/dgdl/Infineon-BTS70012-1ESP-DataSheet-v01_10-EN.pdf?fileId=5546d462758f5bd1017598473e2a39a7, Height=1.15mm, Manufacturer_Part_Number=BTS700121ESPXUMA1, Mouser Price/Stock=https://www.mouser.co.uk/ProductDetail/Infineon-Technologies/BTS700121ESPXUMA1?qs=81r%252BiQLm7BTuVhpblMU93g%3D%3D
Q2: library part CMP-1058-00417-1, "Power MOSFET, 24 A, 60 V, Logic Level, N-Channel, 3-Pin DPAK, Pb-Free, Tape and Reel", Manufacturer="On Semiconductor", Package Type=DPAK-3, Channel Polarity="N Channel", Ciss Typ (pF)=814, ComponentLink1Description="Manufacturer URL", ComponentLink1URL=http://www.onsemi.com/, ComponentLink2Description=Datasheet, ComponentLink2URL=http://www.onsemi.cn/pub_link/Collateral/NTD24N06L-D.PDF, ComponentLink3Description="Package Specification", ComponentLink3URL=http://www.onsemi.cn/pub_link/Collateral/369C.PDF, Configuration=Single, Coss Typ (pF)=258, Crss Typ (pF)=80, DatasheetVersion="Rev. 3", Mounting Technology="Surface Mount", PackageDescription="3-Pin Flange Mount, Body 6.54 x 6.095 mm, Pitch 2.29 mm", PackageReference=DPAK-3-369C-01, PackageVersion="Rev. E, 02/2014", Packing="Tape and Reel", PartNumber=NTD24N06LT4G, Qrr Typ (nC)=84, RoHS=Pb-Free, V(BR)DSS Min (V)=60, VGS(th) Max (V)=2
R1 R4 R9 R12 R13 R16 R17 R20 R21 R24: library part CMP-2001-00550-5, "Chip Resistor, 4.7 KOhm, +/- 1%, 0.125 W, -55 to 155 degC, 0805 (2012 Metric), RoHS, Tape and Reel", Manufacturer=Panasonic, Max Operating Temperature="155 degC", Min Operating Temperature="-55 degC", Package Quantity=5000, Voltage Rating="150 V", ComponentLink1Description="Manufacturer URL", ComponentLink1URL=http://www.panasonic.com/, ComponentLink2Description=Datasheet, ComponentLink2URL=http://industrial.panasonic.com/cdbs/www-data/pdf/RDA0000/AOA0000C86.pdf, DatasheetVersion=04/2015, Height="0.6 mm", Length="2 mm", Mount="Surface Mount", Mounting Technology="Surface Mount", PackageDescription="2-Pin Surface Mount Device, Body 2 x 1.25 mm", PackageReference=0805, Packaging="Tape and Reel", Pins=2, REACH SVHC=Yes, RoHSCompliant=true
R2 R10 R14 R18 R22: library part CMP-2001-00205-1, Manufacturer=Panasonic, Part Number=ERJ6ENF47R0V
R3 R11 R15 R19 R23: library part CMP-2003-04407-1, Manufacturer=Panasonic, Part Number=ERA8AEB103V
R5: library part CMP-2000-06925-2, "RES SMD 0 OHM JUMPER 1/10W 0603", Manufacturer=Yageo, Manufacturer Part Number=RC0603FR-070RL, Package=RC0603, Power Rating=0.1W, Resistance=0Ω, Temperature="-55°C to +155°C", Temperature Range High=+155°C, Temperature Range Low=-55°C, Tolerance=1%, Voltage Rating=75V, Automotive=No, Category=Res, ComponentLink2Description=Datasheet, ComponentLink2URL=http://www.yageo.com/documents/recent/PYu-RC_Group_51_RoHS_L_10.pdf, Composition="Thick Film", Device Class L1="Passive Components", Device Class L2=Resistors, Device Class L3="Chip SMD Resistors", Digikey Description="RES SMD 0 OHM JUMPER 1/10W 0603", Footprint Url=http://www.yageo.com/exep/pages/download/literatures/PYu-R_Mount_10.pdf, Height=0.55mm, Ipc Land Pattern Name=RESC16080X45, Lead Free=Yes, Mouser Description="RC Series 0603 0.1 W 0 O Jumper Surface Mount Thick Film Chip Resistor", Octopart=https://octopart.com/rc0603fr-070rl-yageo-1180803, RoHS=TRUE, Series=RC_L
R6 R7 R8: library part CMP-2003-04407-1, Manufacturer=Panasonic, Part Number=ERA8AEB103V
U1: library part CMP-12105-000086-1, "IC MCU 32BIT 1MB FLASH 48UFQFPN", Frequency=100MHz, Max Operating Temperature=85°C, Min Operating Temperature=-40°C, Core Architecture=ARM, Interface=I2C, Memory Size=1MB, Memory Type=FLASH, Number of I/Os=36, Oscillator Type=Internal, Peripherals="Brown-out Detect/Reset"
U2: library part CMP-2000-06815-1, "TinyLogic(R) UHS 2-Input AND Gate, 1.65 to 5.5 V, -40 to 85 degC, 5-Pin SOT23, RoHS, Tape and Reel", High Level Output Current=-32mA, Low Level Output Current=32mA, Manufacturer=FairchildSemiconductor, Maximum Operating Temperature=+85C, Minimum Operating Temperature=-40C, Package / Case=SOT-23, Package Description="5-Pin Small Outline Transistor, Body 2.9 x 1.6 mm, Pitch 0.95 mm", Package Reference=SOT23-5, Package Version=08/2015, Supply Voltage - Max=5.5V, Supply Voltage - Min=1.65V, <PCN>=http://www.mouser.com/PCN/3.26.10LTBDFairchild.pdf, Brand=FairchildSemiconductor, Datasheet URL=https://www.fairchildsemi.com/datasheets/NC/NC7SZ08.pdf, Datasheet Version="Rev. 1.0.3, 09/2009", Logic Family=NC7SV, Logic Function=AND, Logic Type=2-InputAND, Manufacturer URL=https://www.fairchildsemi.com/, Mounting Style=SMD/SMT, Mounting Technology=SurfaceMount, Number of Gates=1Gate, Number of Input Lines=2Input, Number of Output Lines=1Output, Package URL=https://www.fairchildsemi.com/package-drawings/MA/MA05B.pdf, Packaging=Reel, Product=Single-FunctionGate, Product Category=LogicGates, Propagation Delay Time=5.2ns, RoHS=True, Series=TinyLogic, Unit Weight=0.001058oz
U3: library part CMP-1063-00076-1, "4-Channel Low Capacitance ESD Protection Array, 6-Pin SC-74, Pb-Free, Tape and Reel", Manufacturer="On Semiconductor", C Max (pF)=2, ComponentLink1Description="Manufacturer URL", ComponentLink1URL=http://www.onsemi.com/, ComponentLink2Description=Datasheet, ComponentLink2URL=http://www.onsemi.com/pub_link/Collateral/CM1293A-04SO-D.PDF, ComponentLink3Description="Package Specification", ComponentLink3URL=http://www.onsemi.com/pub_link/Collateral/318F-05.PDF, DatasheetVersion="Rev. 0", Direction=Unidirectional, IR Max (uA)=1, Mounting Technology="Surface Mount", Number of Lines=4, PackageDescription="6-Pin Small Outline Transistor, Body 3 x 1.5 mm, Pitch 0.95 mm", PackageReference=SC-74-6-318F-05, PackageVersion="Rev. N, 06/2012", Packing="Tape and Reel", PartNumber=CM1293A-04SO, PPK Max (W)=0.225, RoHS=Pb-Free
U4: library part CMP-0476-01834-1, "Micropower Low Dropout Regulator with Shutdown, 4.15 to 30 V Vin, 3.3 V Vout, 3-pin SOT223 (ST-3), -40 to 125 degC, Pb-Free", Dropout Voltage(V)=0.45, Manufacturer="Linear Technology", Output Voltage="3.3 V", Shutdown Current(uA)=16, ComponentLink1Description="Manufacturer URL", ComponentLink1URL=http://www.linear.com/, ComponentLink2Description=Datasheet, ComponentLink2URL=http://cds.linear.com/docs/en/datasheet/112935ff.pdf, ComponentLink3Description="Package Specification", ComponentLink3URL=http://cds.linear.com/docs/en/packaging/SOT_3_05-08-1630.pdf, DatasheetVersion="Rev. F", Discrete Pass Element=no, Iout(mA)=700, Isupply(mA)=0.05, Mounting Technology="Surface Mount", Number of Outputs=1, PackageDescription="3-Pin Plastic SOT-223, 3.505 x 6.505 mm Body, Pitch 2.3 mm", PackageReference=ST-3, PackageVersion=Jun-10, PartNumber=LT1129IST-3.3#PBF, PSRR(dB)=64, RoHS=TRUE, Vin Max(V)=30, Vin Min(V)=4.15
U5: library part CMP-0315-00046-3, "CAN Bus Transceiver, 3.3 V, -40 to 85 degC, 8-Pin SOIC (D), Green (RoHS & no Sb/Br), Tube", Generic Part Number=SN65HVD230, Supply Voltage Max="3.6 V", Supply Voltage Min="3 V", Temperature Max="85 degC", Temperature Min="-40 degC", ComponentLink1Description="Manufacturer URL", ComponentLink1URL=http://www.ti.com/, ComponentLink2Description=Datasheet, ComponentLink2URL="http://www.ti.com/general/docs/lit/getliterature.tsp?genericGeneric Part Number=SN65HVD230&fileType=pdf", DatasheetVersion=SLOS346N, Mounting Technology="Surface Mount", PackageDescription="8-Pin Plastic Small Outline, Body 4.9 x 3.9 mm, Pitch 1.27 mm", Packing=Tube, PartNumber=SN65HVD230D, RoHS=TRUE
XF1 XF2: library part CMP-2000-05461-1, "FUSE HOLDER, PCB MOUNT, 500VAC, 20A, ROHS", Current Rating=30A, Manufacturer=Keystone-Electronics, Voltage=500V, Category=CircuitProtection, Contact Finish=TinNickel, Contact Material=Brass, Datasheet URL=http://datasheet.octopart.com/3557-2-Keystone-datasheet-15715937.pdf, Datasheet Version=Apr-13, Family=Fuseholders, For Use With/Related Products=ATC,ATO257,MINI897, Fuse Size="0.43\"Lx0.15\"Wx0.64\"H(10.92mmx3.81mmx16.25mm)", Fuse Type=Blade, Fuseholder Type=Block, Manufacturer URL=http://www.keyelco.com/, Mounting Type=PCB, Number of Circuits=1, Orientation=Vertical, Series=-, Termination Style=PCPin
Y1: library part CMP-18717-000318-1, "Crystal 24MHz, 10ppm, 10pF, 50Ω", Case/Package=SMD/SMT, ESR (Equivalent Series Resistance)=60R, Frequency Stability=10ppm, Load Capacitance=10pF, Max Operating Temperature=70°C, Min Operating Temperature=-20°C, Package Quantity=3000, Depth=2.5mm, Frequency=24MHz, Frequency Tolerance=10ppm, Height=0.031inch, Lead Free="Lead Free", Length=3.2mm, Mount="Surface Mount", Number of Pins=4, Packaging="Tape and Reel", REACH SVHC="No SVHC", Series=7M, Termination=SMD/SMT, Tolerance=10ppm, Width=0.098inch

## Free pads (board coordinates)
  round 180 hole 120: 17(5570,3005)

## Via types
v1: diameter 17.72, hole 7.87, Top Layer to Bottom Layer, 514 vias

## Nets (pads, with @x,y where several pads share a name; then routed paths per layer and width w, separated by ;. In a path a pad name is that pad's centre, name@x,y a point inside that pad or via, vN(x,y) a via of type N, cw(c..) or ccw(c..) an arc to the next point about the centre after c; other vN are vias at no path point)
3V3: C6.1 C7.1 C8.1 C9.1 C20.1 C21.1 C24.1 C25.1 J1.B3 J2.1 U1.1 U1.7 U1.9 U1.24 U1.36 U1.48 U2.5 U3.5 U4.3 U5.3 | length 1124.8
  Top Layer w10: v1(3608.86,4239) 3623.3,4253.44 C9.1 3647.62,4238.97 3655,4238.97 U1.48 3677.3,4216.68 3677.3,4188.84 U1.1 ; v1(3682,4088) C6.1 3726.43,4089.84 3744.05,4089.84 3756.05,4101.84 U1.7 ; v1(3767.44,4016.48) 3768.91,4017.96 3768.91,4030.49 3775.02,4036.59 3775.02,4062.57 3785.17,4072.72 U1.9 ; U1.36 3865.21,4376.75 3865.21,4388.62 C8.1 3899.01,4426.7 v1(3870,4455.72) ; U1.24 4016.12,4185.36 4022.69,4178.79 4094.62,4178.79 C7.1 v1(4125,4205) ; U2.5 4217.13,2955 v1(4260,2955) ; C24.1 4427.44,4345 4467.09,4345 4469.69,4347.6 C25.1 4522.4,4355 U5.3 ; v1(5190,4380) 5191.48,4378.52 5191.48,4345.77 U3.5
  Top Layer w30: v1(4620,3930) C20.1@4620,3994.76
  Top Layer w50: C20.1 C20.1@4620,3994.76 ; C21.1 4777.56,4144.96 4779.53,4144.96 4819.57,4185 v1(4825,4185) 4826.89,4186.89 U4.3
  Bottom Layer w10: v1(4075,4296.75) 4075,4298.84 4088.52,4312.36 4088.52,4331.43 4112.09,4355 J2.1
  other v1: 3740.57,4085.08 3673.08,4191.8 4465,4345
+12: C10.1 C11.1 C12.1 C13.1 C14.1 C17.1 C18.1 C19.1 D1.2 J1.A11 J1.A12 J1.B10 K1.4 Q1.25 Q3.25 Q4.25 Q5.25 Q6.25 U4.1 XF1.1 XF1.2 XF2.1 XF2.2 | length 742.2
  Top Layer w50: U4.1 5067.91,4184.53 5166.54,4184.53 5169.88,4181.18 C19.1 ; C19.1@5175.84,4180.34 5180.96,4180.34 5250,4111.3 5250,3994.15 5317.5,3926.65 5413.16,3926.65 5485.71,3999.2 5594.08,3999.2 J1.B10
  other v1: 4550,1400 4600,1400 4650,1400 4700,1400 4750,1400 4800,1400 4850,1400 5200,1400 5250,1400 5300,1400 5350,1400 5400,1400 4525,1450 4575,1450 4625,1450 4675,1450 4725,1450 4775,1450 4825,1450 4975,1450 5025,1450 5225,1450 5275,1450 5325,1450 5375,1450 5425,1450 4550,1500 4600,1500 4650,1500 4700,1500 4750,1500 4800,1500 4850,1500 4525,1550 4575,1550 4625,1550 4675,1550 4725,1550 4775,1550 4825,1550 5425,1550 5200,1600 5250,1600 5300,1600 5350,1600 5400,1600 5225,1650 5275,1650 5425,1650 5200,1700 4525,1750 4575,1750 4625,1750 4675,1750 4725,1750 4775,1750 4825,1750 4975,1750 5025,1750 5075,1750 5375,1750 5425,1750 4550,1800 4600,1800 4650,1800 4700,1800 4750,1800 4800,1800 4850,1800 4900,1800 4950,1800 5000,1800 5050,1800 5100,1800 5400,1800 4525,1850 4575,1850 4625,1850 4675,1850 4725,1850 4775,1850 4825,1850 4875,1850 4925,1850 4975,1850 5025,1850 5075,1850 5425,1850 4700,1900 4750,1900 4800,1900 4850,1900 5400,1900 4725,1950 4775,1950 4825,1950 4975,1950 5025,1950 5325,1950 5375,1950 5425,1950 4700,2000 4750,2000 4800,2000 4850,2000 4525,2050 4575,2050 4625,2050 4675,2050 4725,2050 4775,2050 4825,2050 5300,2100 5350,2100 4850,2200 4525,2250 4625,2250 4675,2250 4725,2250 4775,2250 4825,2250 4975,2250 5025,2250 5075,2250 5325,2250 5375,2250 4550,2300 4600,2300 4650,2300 4700,2300 4750,2300 4800,2300 4850,2300 4900,2300 4950,2300 5000,2300 5050,2300 5100,2300 5300,2300 4525,2350 4575,2350 4725,2350 4775,2350 4825,2350 4875,2350 4925,2350 4975,2350 5025,2350 5075,2350 5275,2350 4550,2400 4700,2400 4750,2400 4800,2400 4850,2400 5250,2400 5300,2400 5350,2400 4775,2450 4825,2450 4975,2450 5025,2450 5225,2450 5275,2450 5325,2450 5375,2450 4550,2500 4600,2500 4650,2500 4700,2500 4800,2500 4850,2500 5200,2500 5250,2500 5300,2500 5350,2500 4525,2550 4575,2550 4625,2550 4675,2550 4725,2550 5225,2550 5275,2550 5325,2550 4550,2600 4600,2600 4650,2600 4700,2600 4750,2600 4800,2600 5200,2600 5250,2600 5300,2600 5225,2650 4550,2700 4750,2700 4800,2700 5200,2700 5400,2700 4525,2750 4825,2750 4975,2750 5025,2750 5075,2750 5375,2750 5425,2750 4850,2800 4900,2800 4950,2800 5000,2800 5050,2800 5100,2800 5300,2800 5350,2800 5400,2800 4525,2850 4975,2850 5025,2850 5075,2850 5275,2850 5325,2850 5375,2850 5425,2850 4550,2900 5200,2900 5250,2900 5300,2900 5350,2900 5400,2900 4525,2950 4575,2950 4625,2950 5025,2950 5225,2950 5275,2950 5325,2950 5375,2950 5425,2950 4550,3000 5200,3000 5250,3000 5300,3000 5350,3000 5400,3000 5225,3050 5275,3050 5325,3050 5375,3050 5425,3050 5200,3100 5250,3100 5300,3100 5350,3100 5400,3100 5225,3150 5275,3150 5325,3150 5375,3150 5425,3150 3950,3200 4150,3200 4200,3200 4250,3200 4300,3200 4350,3200 4400,3200 4450,3200 4750,3200 4800,3200 4850,3200 5250,3200 5300,3200 5350,3200 5400,3200 4175,3250 4225,3250 4275,3250 4325,3250 4375,3250 4425,3250 4475,3250 4775,3250 4825,3250 5325,3250 5375,3250 5425,3250 4000,3300 4050,3300 4100,3300 4150,3300 4200,3300 4250,3300 4300,3300 4350,3300 4400,3300 4450,3300 4750,3300 4800,3300 4850,3300 4900,3300 4950,3300 5350,3300 5400,3300 3975,3350 4175,3350 4225,3350 4275,3350 4325,3350 4375,3350 4425,3350 4475,3350 4775,3350 4825,3350 4875,3350 4925,3350 4975,3350 5025,3350 5425,3350 3950,3400 4000,3400 4150,3400 4200,3400 4250,3400 4300,3400 4350,3400 4400,3400 4450,3400 4500,3400 4750,3400 4800,3400 4850,3400 3975,3450 4025,3450 4075,3450 4125,3450 4175,3450 4225,3450 4275,3450 4325,3450 4375,3450 4425,3450 4475,3450 4525,3450 4725,3450 4775,3450 4825,3450 4975,3450 5025,3450 3950,3500 4000,3500 4150,3500 4200,3500 4250,3500 4300,3500 4350,3500 4400,3500 4450,3500 4500,3500 3975,3550 4175,3550 4225,3550 4275,3550 4325,3550 4375,3550 4425,3550 4475,3550 4525,3550 3950,3600 4000,3600 4050,3600 4100,3600 4150,3600 4200,3600 4250,3600 4300,3600 4350,3600 4400,3600 4450,3600 4500,3600 3975,3650 4175,3650 4225,3650 4275,3650 4325,3650 4375,3650 4425,3650 4475,3650 4525,3650 3950,3700 4000,3700 4150,3700 4200,3700 4250,3700 4300,3700 4350,3700 4400,3700 4450,3700 4500,3700
CAN_N: D2.1 J1.B7 U5.6 | length 808.8
  Top Layer w15: U5.6 5095,4355 5155,4415 D2.1 5398.06,4415 5483.06,4500 J1.B7
CAN_P: D2.2 J1.B6 U5.7 | length 709.1
  Top Layer w15: U5.7 4853.68,4407.46 4917.46,4407.46 4937.89,4427.89 4937.89,4512.89 4969.73,4544.73 5000.27,4544.73 5018.79,4526.21 5018.79,4511.21 5035,4495 5060,4495 5080,4515 5080,4525 5100,4545 5145.67,4545 5224.49,4466.18 D2.2 5298.34,4466.18 5332.16,4500 J1.B6
CANRX: U1.32 U5.4 | length 731.7
  Top Layer w10: U1.32@3921.71,4320.61 3933.1,4332 4113.97,4332 4124.47,4342.5 4155.53,4342.5 4187.99,4310.04 4623.74,4310.04 U5.4
CANTX: U1.33 U5.1 | length 781.4
  Top Layer w10: U1.33 3918.98,4347 3990.74,4347 4104.74,4461 4622.78,4461 U5.1
Downshift: C1.2 J1.A8 Q1.13 Q1.14 Q1.15 Q1.16 Q1.17 Q1.18 Q1.19 Q1.20 Q1.21 Q1.22 Q1.23 Q1.24 | length 654
  Top Layer w75: Q1.24 Q1.23 Q1.22 Q1.21 Q1.20 Q1.19 Q1.18 Q1.17 Q1.16 Q1.15 Q1.14 Q1.13 5137.4,1887.4 J1.A8
DownshiftDrive: R1.1 R3.1 U1.18 | length 2141.1
  Top Layer w10: R3.1 R1.1 3765.55,2424.45 v1(3710,2480) ; U1.18 3931.33,4100.56 3940.62,4091.27 3940.62,4064.6 3945,4060.22 v1(3945,4031.47)
  Bottom Layer w10: v1(3710,2480) 3640,2550 3640,2835.53 3585,2890.53 3585,3685 3740,3840 3766.17,3840 3897.7,3971.53 3897.7,3992.7 3920.33,4015.33 3927.4,4015.33 3943.54,4031.47 v1(3945,4031.47)
ECUPowerOut: J1.B12 XF2.3 XF2.4
ETCEnableDrive: R21.1 R23.1 U1.42 | length 1381.2
  Top Layer w10: U1.42 3707.15,4353.86 3622.11,4353.86 3415,4146.75 3415,3873.25 3489.71,3798.54 3536.31,3798.54 3542.17,3792.69 3542.17,3737.39 3548.02,3731.54 3599.61,3731.54 3605.47,3737.39 3605.47,3792.69 3611.33,3798.54 R23.1@3676.18,3798.54 ; R23.1@3676.18,3798.54 R21.1@3747.91,3798.54 ; R23.1@3676.18,3798.54 R23.1 R21.1 ; R21.1@3747.91,3798.54 R21.1@3765.55,3780.91 ; R21.1@3747.91,3798.54 R21.1@3765.55,3780.91 ; R21.1 R21.1@3765.55,3780.91 ; R21.1 R21.1@3765.55,3780.91
ETCEnableIn: J1.B9 R6.1 U1.10 U2.1 U3.3 | length 3418.3
  Top Layer w10: U1.10 3799.09,4058.8 3791.18,4050.89 3791.18,4028.8 3791.3,4028.69 3791.3,3985.04 ; v1(3800,3715) 3800,3841.56 3786.14,3855.41 3786.14,3979.88 3791.3,3985.04 ; v1(3900,3935) 3849.96,3985.04 3791.3,3985.04 ; v1(3905,3135) 3956.9,3135 4016.9,3075 R6.1 4050,3063.19 4087.05,3026.14 4201.7,3026.14 4207.56,3032 4207.56,3049.37 U2.1 ; v1(3930,3980) 4161.77,3980 4444.53,4262.76 4888.48,4262.76 4924.59,4298.86 5124.88,4298.86 5126.18,4297.56 5192.8,4297.56 5218.78,4271.58 5218.78,4267.28 5232.4,4253.66 5232.4,4241.85 5241.18,4233.07 5379.5,4233.07 5442.49,4170.08 J1.B9
  Bottom Layer w10: v1(3800,3715) 3800,3240 v1(3905,3135) ; v1(3900,3935) 3901.48,3936.48 3901.48,3951.48 v1(3930,3980)
ETCEnableOut: C22.2 J1.B2 Q6.13 Q6.14 Q6.15 Q6.16 Q6.17 Q6.18 Q6.19 Q6.20 Q6.21 Q6.22 Q6.23 Q6.24 | length 595.3
  Top Layer w75: C22.2 5137.4,3401.97 Q6.13 Q6.14 Q6.15 Q6.16 Q6.17 Q6.18 Q6.19 Q6.20 Q6.21 Q6.22 Q6.23 Q6.24 5248.98,3740.75 5348.39,3840.16 J1.B2
ETCMCUEnable: R7.1 U1.41 U2.2 | length 1861.2
  Top Layer w10: R7.1 3762.83,3025 3828.98,3091.14 3828.98,3092.72 3895.12,3158.86 3903.86,3158.86 ; v1(3745,4350) 3746.48,4348.52 3746.48,4342.37 U1.41 ; v1(3810,3960) 3810,3933.46 3843.46,3900 3843.46,3850.29 3908.86,3784.88 3908.86,3215.12 3903.86,3210.12 3903.86,3158.86 ; U2.2 4178.94,3064.06 4165.32,3077.68 4165.32,3081.98 4159.46,3087.83 4106.43,3087.83 4075.8,3118.46 4001.54,3118.46 3961.14,3158.86 3903.86,3158.86
  Bottom Layer w10: v1(3745,4350) 3745,4160 3810,4095 v1(3810,3960)
ETCPowerOut: J1.B1 K1.3 | length 1191.5
  Bottom Layer w200: K1.3 5350,3483.03 J1.B1
FanDrive: R17.1 R19.1 U1.40 | length 1540.4
  Top Layer w10: R19.1 R17.1 3765.55,3405.91 3626.81,3544.65 3626.81,3654.68 3633.86,3661.73 3633.86,3684.88 3602.21,3716.54 3541.81,3716.54 3395,3863.35 3395,4147.96 3620.9,4373.86 3754.88,4373.86 3768.86,4359.88 3768.86,4349.11 3785.17,4332.79 U1.40
FanOut: C16.2 J1.A10 Q5.13 Q5.14 Q5.15 Q5.16 Q5.17 Q5.18 Q5.19 Q5.20 Q5.21 Q5.22 Q5.23 Q5.24 | length 1401.1
  Top Layer w75: Q5.24 Q5.23 Q5.22 Q5.21 Q5.20 Q5.19 Q5.18 Q5.17 Q5.16 Q5.15 Q5.14 Q5.13 5137.4,2901.97 C16.2 5135.43,2864.57 5440.96,2559.04 5440.96,2097.3 5350,2006.33 J1.A10
GND: C1.1 C2.2 C3.2 C4.2 C5.1 C6.2 C7.2 C8.2 C9.2 C10.2 C11.2 C12.2 C13.2 C14.2 C15.1 C16.1 C17.2 C18.2 C19.2 C20.2 C21.2 C22.1 C24.2 C25.2 J1.A1 J1.A2 J1.A3 J1.A4 J1.A5 J1.A6 J1.B8 J1.B11 J2.5 pad.17 Q2.3 R2.1 R3.2 R4.1 R6.2 R7.2 R8.2 R10.1 R11.2 R12.1 R14.1 R15.2 R16.1 R18.1 R19.2 R20.1 R22.1 R23.2 R24.1 U1.8 U1.23 U1.35 U1.44 U1.47 U1.49 U2.3 U3.2 U4.2 U4.4 U5.2 U5.8 Y1.2 Y1.4 | length 3321.7
  Top Layer w10: C3.2 v1(3455.36,3920.26) 3455.36,3960.52 Y1.4 ; Y1.2 3533.46,4062.24 3564.74,4093.52 3583.52,4093.52 v1(3585,4095) ; C4.2 3549.64,4151.21 3578.43,4180 v1(3580,4180) ; R11.2 v1(3625,1900) ; R3.2 v1(3625,2300) ; R15.2 3590.47,2683.35 3590.47,2651.62 3600,2642.09 v1(3600,2640) ; R19.2 v1(3625,3400) ; R23.2 3590.47,3791.65 3590.47,3833.38 3600,3842.91 v1(3600,3845) ; R7.2 v1(3678.86,3025) ; R12.1 v1(3712.5,1725) R10.1 ; R4.1 v1(3712.5,2125) R2.1 ; R16.1 v1(3712.5,2525) R14.1 ; R20.1 v1(3712.5,3225) R18.1 ; R24.1 v1(3712.5,3600) R22.1 ; v1(3685,4330) 3656.7,4301.7 C9.2 3658.79,4294.62 3658.79,4263.02 U1.47 ; v1(3710,4310) 3711.15,4308.85 3711.15,4294.01 3729.33,4275.83 U1.44 ; v1(3753.63,3987.08) 3734.62,4006.1 3734.62,4031.21 3760.02,4056.61 3760.02,4070.78 3764.43,4075.2 3764.43,4079.82 3771.25,4086.64 U1.8 ; U1.49@3810,4255 3810,4237.09 U1.49 ; U1.35 3907.51,4391.21 3934.62,4391.21 C8.2 3946.76,4393.3 v1(3956.2,4383.86) ; R6.2 3947.64,3063.19 3916.48,3032.03 3916.48,3026.48 v1(3915,3025) 3916.48,3023.52 3916.48,3019.15 3948.82,2986.81 R8.2 ; v1(3975.39,4020) 3976.86,4021.48 3991.48,4021.48 C2.2 ; U1.23 4026.98,4145.38 4061.21,4145.38 4065.38,4141.21 4065.38,4135.39 4083.52,4117.26 4083.52,4096.48 v1(4085,4095) ; Q2.3 4013.78,2796.22 v1(4015,2795) ; v1(4105,3055) 4138.39,3055 U2.3 ; C24.2 4417.44,4415 4507.6,4415 C25.2 4591.69,4422.4 4609.09,4405 U5.2 ; U5.8 v1(4905,4455) ; v1(5100,4275) 5102.09,4275 5104.53,4277.44 5175.52,4277.44 5181.38,4271.58 5181.38,4267.28 5195,4253.66 U3.2
  Top Layer w30: v1(4310,1880) 4310,1949.76 C18.2 ; v1(4330,3925) 4330,3994.76 C20.2 ; C21.2 4780,4062.6 v1(4780,4010) ; v1(4898,2861) 4914.86,2877.86 4914.86,2886.01 C11.2@4926.14,2897.28 ; v1(4900,1400) C14.2 ; v1(4900,1900) C13.2 ; v1(4900,2400) C12.2 ; v1(4900,3400) C10.2 ; v1(4970,4140) 4972.28,4142.28 4972.28,4184.17 U4.2 ; U4.4 5066.89,3923.11 v1(5070,3920) 5091.42,3898.58 5177.36,3898.58 C17.2 ; C5.1 5065,1400.43 v1(5065,1445) ; C1.1 5065,1900.43 v1(5065,1945) ; C15.1 5065,2400.43 v1(5065,2445) ; C16.1 5065,2900.43 v1(5065,2945) ; C22.1 5065,3400.43 v1(5065,3445) ; v1(5115,4080) 5173.82,4080 C19.2
  Bottom Layer w10: v1(4040,4460) 4042.09,4460 4047.09,4455 J2.5
  other v1: 4015,2880 3845,4075 3840,4150 3815,4155 3865,4155 3790,4170 3890,4170 3970,4200 3715,4205 3810,4235 3870,4235 3845,4325 4465,4415
NetC2_1: C2.1 U1.22 | length 104.3
  Top Layer w10: U1.22 4028.26,4116.26 4028.26,4099.32 C2.1
NetC3_1: C3.1 R5.2 Y1.1 | length 192.5
  Top Layer w10: C3.1 3504.64,3938.93 3533.46,3967.76 Y1.1 3602.13,3971.69 3615,3984.57 R5.2
NetC4_1: C4.1 U1.5 Y1.3 | length 348.4
  Top Layer w10: Y1.3 3466.54,4062.24 3508.15,4103.86 ; C4.1 3500.36,4111.66 3508.15,4103.86 ; U1.5 3728.21,4129.68 3720.3,4121.77 3707.95,4121.77 3702.86,4126.86 3573.61,4126.86 3550.61,4103.86 3508.15,4103.86
NetC23_1: C23.1 U5.5 | length 312
  Top Layer w10: U5.5 4831.54,4305 4806,4330.54 4806,4370 4816,4380 4932.6,4380 4968.07,4415.47 4970.04,4415.47 4992.6,4438.03 C23.1
NetC23_2: C23.2 D2.3 | length 84.1
  Top Layer w10: C23.2 5067.99,4440.59 D2.3
NetD1_1: D1.1 K1.1 Q2.4 | length 481.7
  Top Layer w30: K1.1 4418.54,2301.18 4418.54,2251.22 4419.76,2250 D1.1
  Top Layer w100: Q2.4 4103.94,2542.91 4270.47,2376.38 K1.1
NetK1_2: K1.2 XF1.3 XF1.4 | length 302
  Bottom Layer w200: XF1.3 XF1.4 4615.75,3103.98 K1.2
NetQ1_4: Q1.4 R2.2 | length 1095.1
  Top Layer w10: R2.2 3880,2125 v1(3910,2155) ; v1(4860,2165) 4860.51,2164.49 4912.09,2164.49 Q1.4
  Bottom Layer w10: v1(3910,2155) 4847.91,2155 4857.91,2165 v1(4860,2165)
NetQ1_5: Q1.5 R1.2 | length 1164.9
  Top Layer w10: R1.2 v1(3885,2300) ; v1(4820,2180) 4820,2178.54 4836.14,2162.4 4836.14,2144.24 4842,2138.39 Q1.5
  Bottom Layer w10: v1(3885,2300) 4015,2170 4418.78,2170 4428.78,2180 v1(4820,2180)
NetQ1_6: Q1.6 R4.2 | length 1403.1
  Top Layer w10: R4.2 3591.71,2123.84 3591.71,2078.29 v1(3610,2060) ; v1(4853.67,2114.53) 4855.76,2114.53 4857.49,2112.8 Q1.6
  Bottom Layer w10: v1(3610,2060) 3894.56,2060 3902.41,2067.85 4200.59,2067.85 4252.26,2119.53 4549.84,2119.53 4554,2115.37 4852.83,2115.37 v1(4853.67,2114.53)
NetQ2_1: Q2.1 R8.1 U2.4 | length 246.6
  Top Layer w10: R8.1 4051.18,2972.44 4067.83,2955.79 U2.4 4141.54,2949.88 4150.32,2941.1 4156.22,2941.1 4194.09,2903.23 Q2.1
NetQ3_4: Q3.4 R10.2 | length 1103.9
  Top Layer w10: R10.2 v1(3885,1725) ; v1(4860,1665) 4860.51,1664.49 4912.09,1664.49 Q3.4
  Bottom Layer w10: v1(3885,1725) 3945.51,1664.49 4859.49,1664.49 v1(4860,1665)
NetQ3_5: Q3.5 R9.2 | length 1218.6
  Top Layer w10: R9.2 v1(3890,1900) ; v1(4838.87,1689.67) 4837.39,1688.19 4837.39,1676.13 4836.14,1674.88 4836.14,1655.12 4852.4,1638.86 4874.88,1638.86 4875.36,1638.39 Q3.5
  Bottom Layer w10: v1(3890,1900) 4110,1680 4469.78,1680 4478.13,1688.35 4837.55,1688.35 v1(4838.87,1689.67)
NetQ3_6: Q3.6 R12.2 | length 1398.1
  Top Layer w10: R12.2 3590.55,1676.54 3605,1662.09 v1(3605,1660) ; v1(4865,1615) 4866.1,1613.9 4911.5,1613.9 Q3.6
  Bottom Layer w10: v1(3605,1660) 3650,1615 v1(4865,1615)
NetQ4_4: Q4.4 R14.2 | length 1141.6
  Top Layer w10: R14.2 v1(3890,2525) ; v1(4865,2660) 4867.09,2660 4871.06,2663.98 Q4.4
  Bottom Layer w10: v1(3890,2525) 3948.93,2583.93 3948.93,2593.93 4006.38,2651.38 4854.29,2651.38 4862.91,2660 v1(4865,2660)
NetQ4_5: Q4.5 R13.2 | length 1122.3
  Top Layer w10: R13.2 v1(3890,2700) ; v1(4830,2675.24) 4830,2673.15 4837.67,2665.48 4837.67,2653.59 4855.12,2636.14 4874.88,2636.14 4877.13,2638.39 Q4.5
  Bottom Layer w10: v1(3890,2700) 3890,2697.91 3921.53,2666.38 4716.04,2666.38 4724.66,2675 4829.76,2675 v1(4830,2675.24)
NetQ4_6: Q4.6 R16.2 | length 1442.6
  Top Layer w10: v1(3590,2480) 3590,2524.45 R16.2 ; v1(4865,2610) 4867.09,2610 4869.88,2612.8 Q4.6
  Bottom Layer w10: v1(3590,2480) 3613.86,2456.14 4711.14,2456.14 v1(4865,2610)
NetQ5_4: Q5.4 R18.2 | length 1135.2
  Top Layer w10: R18.2 v1(3885,3225) ; v1(4766.97,3162.24) 4794.09,3162.24 4795.83,3163.98 Q5.4
  Gnd w10: v1(4496.89,3138.34) 4584.02,3138.34 4592.46,3146.77 4672.5,3146.77 4678.13,3141.15 4745.87,3141.15 v1(4766.97,3162.24)
  Bottom Layer w10: v1(3885,3225) 3924.07,3185.93 3924.07,3175.93 3961.66,3138.34 v1(4496.89,3138.34)
NetQ5_5: Q5.5 R17.2 | length 1214.5
  Top Layer w10: R17.2 3839.45,3395 v1(3870,3395) ; v1(4734.61,3165.01) 4736.08,3163.53 4736.08,3151.1 4748.35,3138.83 4759.91,3138.83 4760.36,3138.39 Q5.5
  Gnd w10: v1(4487.71,3169.49) 4514.87,3169.49 4516.57,3167.8 4679.16,3167.8 4681.95,3165.01 v1(4734.61,3165.01)
  Bottom Layer w10: v1(3870,3395) 3870,3362.02 4064.23,3167.8 4273.34,3167.8 4275.03,3169.49 v1(4487.71,3169.49)
NetQ5_6: Q5.6 R20.2 | length 1408.1
  Top Layer w10: R20.2 3608.19,3207.36 3608.19,3173.9 3620,3162.09 v1(3620,3160) ; v1(4755.76,3114.97) 4756.85,3113.88 4911.51,3113.88 Q5.6
  Gnd w10: v1(4496.89,3105.86) 4574.8,3105.86 4595.59,3126.65 4671.41,3126.65 4684.93,3113.13 4748.13,3113.13 4748.5,3113.5 4754.29,3113.5 v1(4755.76,3114.97)
  Bottom Layer w10: v1(3620,3160) 3668.86,3111.14 4472.51,3111.14 4476.32,3107.34 4495.41,3107.34 v1(4496.89,3105.86)
NetQ6_4: Q6.4 R22.2 | length 1341.4
  Top Layer w8: v1(4877.47,3801.27) 4877.81,3800.93 4877.81,3679.75 4881.55,3676
  Top Layer w10: R22.2 3835,3600.55 v1(3835,3645) ; 4881.55,3676 4893.58,3663.98 Q6.4